# Altium PCB AD Sensor Module - SC.PcbDoc
Units mil, origin at the board's own origin, x right, y up, seen from the top; angles counter-clockwise.
Board outline 3740 x 1375 mil, 2 copper layers (Top Layer, Bottom Layer); 74 components, 51 nets, 249 pads, 53 vias.
Unrouted connection lines stored in the file: 135.
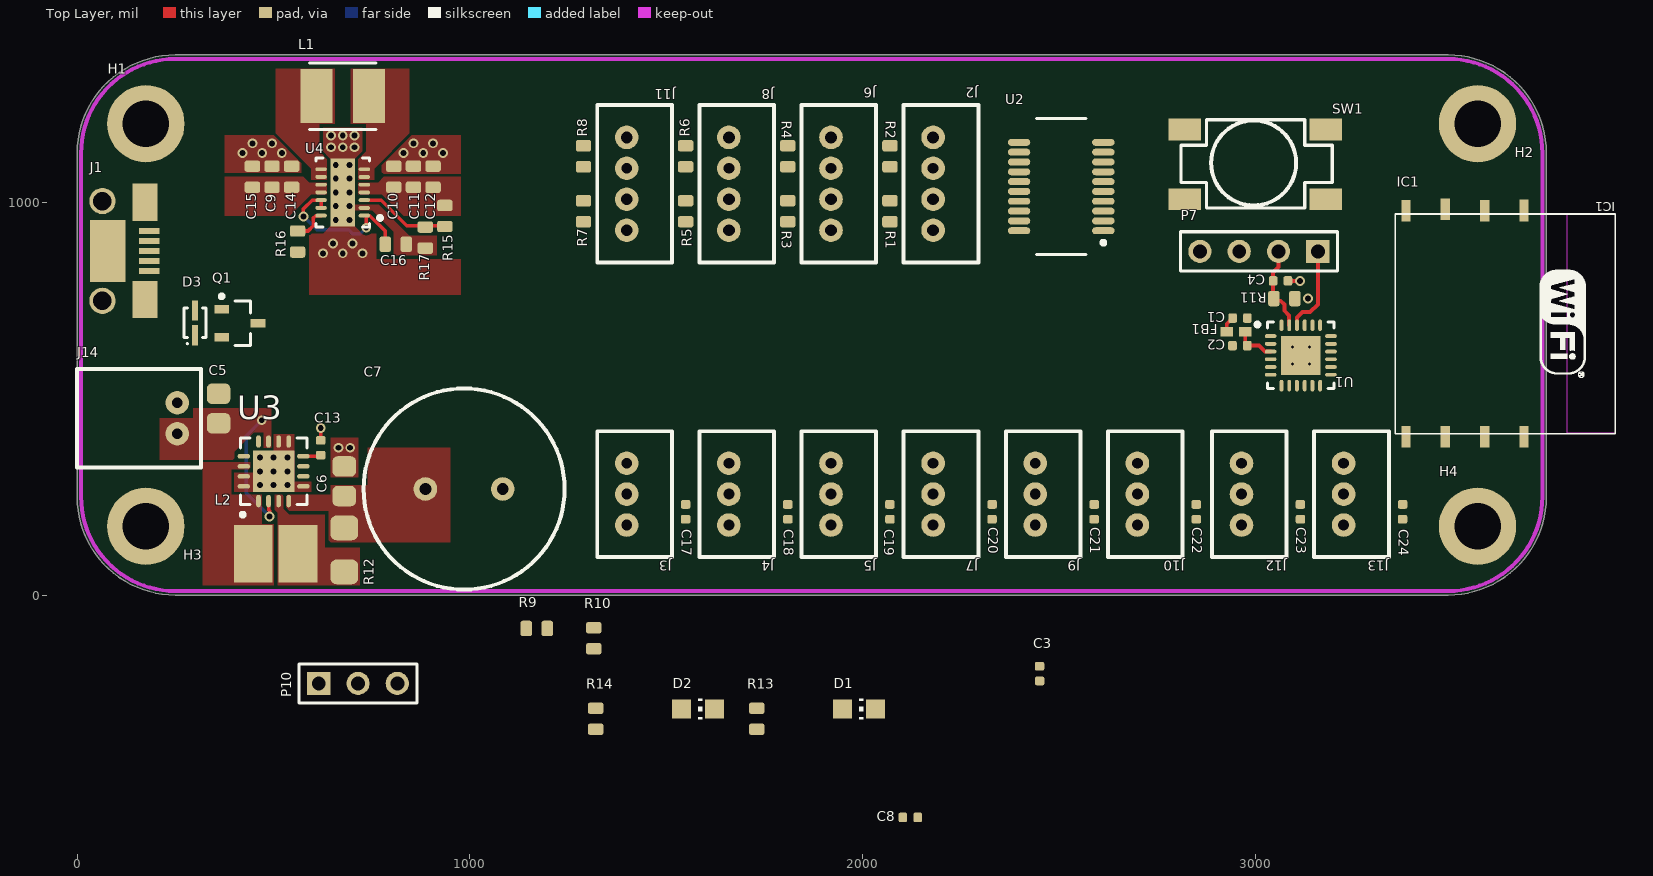
[diagram p0: Top Layer view]
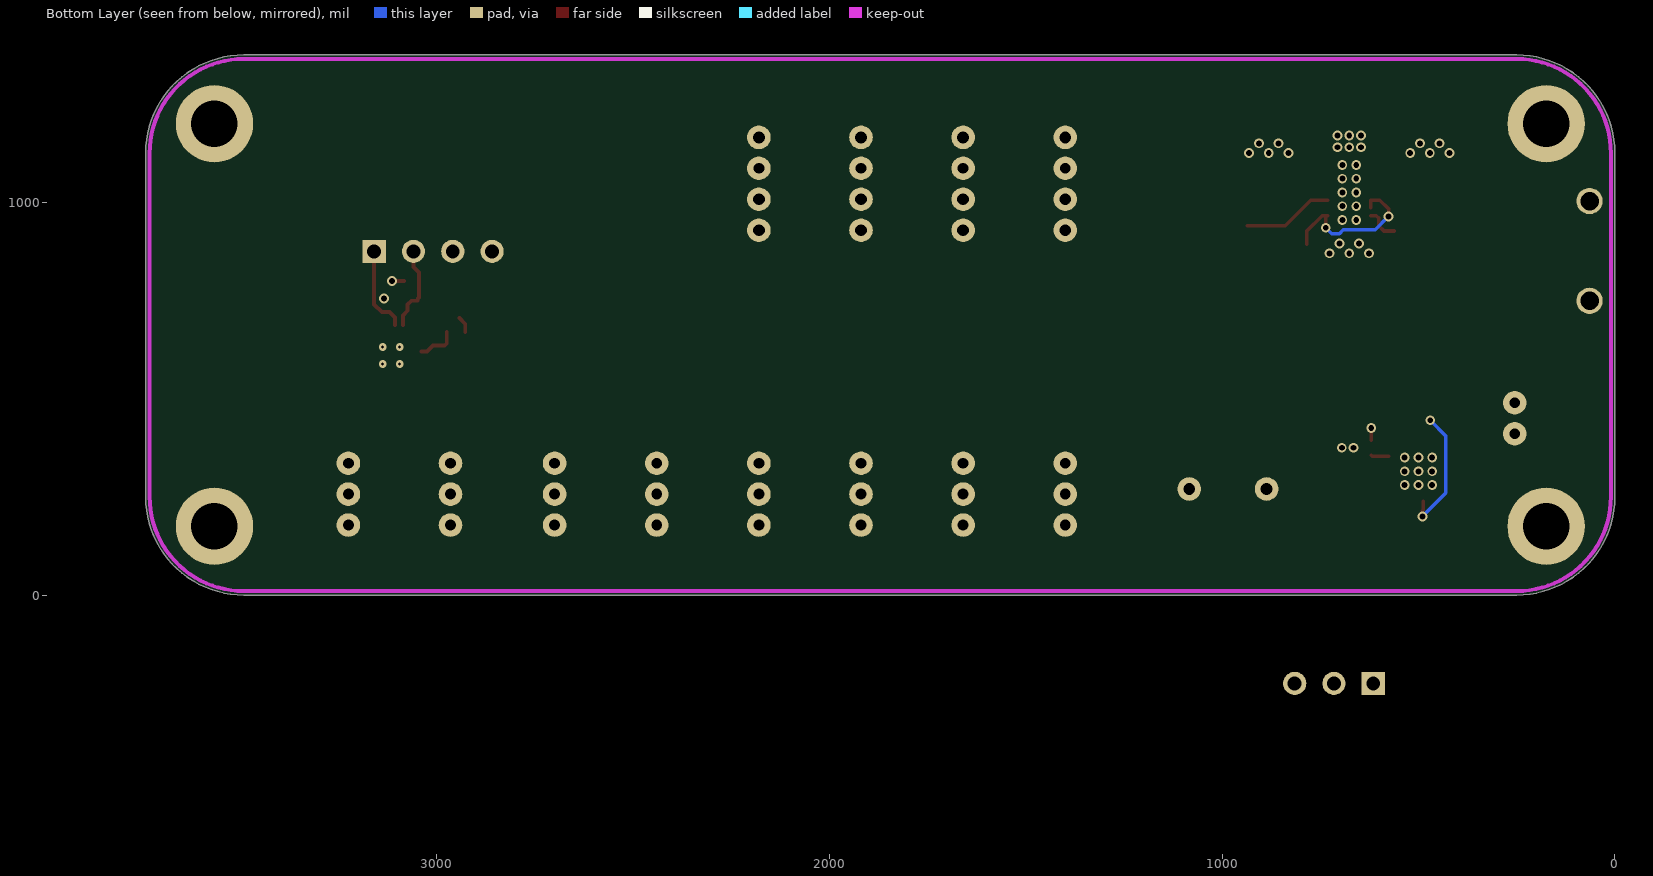
[diagram p1: Bottom Layer view, seen from below]

## Layer stack, top to bottom
Top Solder: solder mask 0.4, Solder Resist, Dk 3.5
Top Layer: signal copper 1.4
Dielectric 1: dielectric 12.6, FR-4, Dk 4.8
Bottom Layer: signal copper 1.4
Bottom Solder: solder mask 0.4, Solder Resist, Dk 3.5

## Board outline
0,250 0,1125 cw(c250,1125) 250,1375 3490,1375 cw(c3490,1125) 3740,1125 3740,250 cw(c3490,250) 3490,0 250,0 cw(c250,250)

## Design rules (kind name [scope] priority, off if disabled: settings)
AcuteAngle [All] p1: minimum=6.00000000000000E+0001 checktracksonly=FALSE
Clearance [All] p1: gap=7
ComponentClearance [All] p1: gap=7 collisioncheckmode=3 verticalgap=10 showdistances=TRUE
FanoutControl Fanout_SOIC [(InComponent('U8') AND InComponent('U7'))] p3: bgadir=Out bgaviamode=Centered fanoutstyle=Staggered fanoutdirection=Alternating viagrid=1 // Fanout_SOIC (Default Rule)
FanoutControl Fanout_Small [All] p4: bgadir=Out bgaviamode=Centered fanoutstyle=Auto fanoutdirection=Alternating viagrid=1 // Fanout_Small (Default Rule)
HoleSize [All] p1: absolutevalues=TRUE maxlimit=200 minlimit=15 maxpercent=80.000 minpercent=20.000
MinimumSolderMaskSliver [All] p1 off: minsoldermaskwidth=10
PasteMaskExpansion [All] p1: expansion=-1
PolygonConnect [All] p1: connectstyle=Direct reliefconductorwidth=10 reliefentries=4 polygonreliefangle="90 Angle" airgapwidth=10
RoutingVias [All] p1: holewidth=15 width=25 viastyle="Through Hole" minholewidth=15 minwidth=25 maxholewidth=28 maxwidth=50
SMDToCorner [All] p1: distance=30000
SilkToSilkClearance [All] p1 off: silktosilkclearance=10
SilkToSolderMaskClearance SilkscreenOverComponentPads [IsPad] p1 off: minsilkscreentomaskgap=10 clearancetoexposedcopper=TRUE
SolderMaskExpansion [All] p1: expansion=4
Width [All] p1: maxlimit=200 minlimit=7 preferedwidth=8 minimp=50.000000 maximp=50.000000 favimp=50.000000
22 further rules are at their usual default settings.

## Components (designator, comment, footprint, x,y, rotation, side; value= is the part's Value field where it differs from the comment)
C1 "100nF" C0402 2960,705 r0 top
C2 "100nF" C0402 2960,635 r180 top
C3 "100nF" C0402 2450,-200 r90 top
C4 "100nF" C0402 3063.23,799.84 r0 top
C5 "0805" C0805 360,475 r270 top
C6 "CL21F475ZPFNNNE" C0805 680,290 r270 top
C7 "106DCN2R7STJD" 106DCN2R7STJD 985,270 r270 top
C8 "100nF" C0402 2121,-566 r180 top
C9 "0603" C0603 496,1065 r270 top
C10 "0603" C0603 806,1065 r270 top
C11 "0603" C0603 856,1065 r270 top
C12 "0603" C0603 906,1065 r270 top
C13 "100nF" C0402 620,375 r90 top
C14 "0603" C0603 546,1065 r270 top
C15 "0603" C0603 446,1065 r270 top
C16 "0603" C0603 811,893 r180 top
C17 "100nF" C0402 1549,212 r270 top
C18 "100nF" C0402 1809,212 r270 top
C19 "100nF" C0402 2069,212 r270 top
C20 "100nF" C0402 2329,212 r270 top
C21 "100nF" C0402 2589,212 r270 top
C22 "100nF" C0402 2849,212 r270 top
C23 "100nF" C0402 3114,212 r270 top
C24 "100nF" C0402 3374,212 r270 top
D1 "5988140107F" LED2012120 1990,-290 r0 top
D2 "5988140107F" LED2012120 1580,-290 r0 top
D3 "BAT20JFILM" "BAT20JFILM - DIOM1712X11N" 300,693 r90 top
FB1 "BLM15HG601SN1D" BLM18PG121SN1D 2950,670 r0 top
H1 "M3 Hole" Hole-3mm#1 230,1200 r0 top
H2 "M3 Hole" Hole-3mm#2 3565,1200 r0 top
H3 "M3 Hole" Hole-3mm#3 235,245 r0 top
H4 "M3 Hole" Hole-3mm#2 3565,175 r0 top
IC1 "ESP8266 ESP-02" "ESP8266 ESP-02" 3915,970 r180 top
J1 "DX4R005J91R5100" "Micro USB Circular Holes Only" 25,875 r270 top
J2 "B4B-PH-K-S LF SN" B4B-PH-K-S(LF)(SN) 2179,1047 r270 top
J3 "B3B-PH-K-S(LF)(SN)" B3B-PH-K-S(LF)(SN) 1399,257 r270 top
J4 "B3B-PH-K-S(LF)(SN)" B3B-PH-K-S(LF)(SN) 1659,257 r270 top
J5 "B3B-PH-K-S(LF)(SN)" B3B-PH-K-S(LF)(SN) 1919,257 r270 top
J6 "B4B-PH-K-S LF SN" B4B-PH-K-S(LF)(SN) 1919,1047 r270 top
J7 "B3B-PH-K-S(LF)(SN)" B3B-PH-K-S(LF)(SN) 2179,257 r270 top
J8 "B4B-PH-K-S LF SN" B4B-PH-K-S(LF)(SN) 1659,1047 r270 top
J9 "B3B-PH-K-S(LF)(SN)" B3B-PH-K-S(LF)(SN) 2439,257 r270 top
J10 "B3B-PH-K-S(LF)(SN)" B3B-PH-K-S(LF)(SN) 2699,257 r270 top
J11 "B4B-PH-K-S LF SN" B4B-PH-K-S(LF)(SN) 1399,1047 r270 top
J12 "B3B-PH-K-S(LF)(SN)" B3B-PH-K-S(LF)(SN) 2964,257 r270 top
J13 "B3B-PH-K-S(LF)(SN)" B3B-PH-K-S(LF)(SN) 3224,257 r270 top
J14 "S2B-PH-K-S(LF)(SN)" S2B-PH-K-S(LF)(SN) 255,450 r270 top
L1 "XFL4020-152ML" "XFL4020-152ML - INDP4040X21N" 676,1270 r0 top
L2 "SRN4018-4R7M" "SRN4018-4R7M - INDP4040X18N" 505,105 r0 top
P7 "Header 4" HDR1X4 3158.23,874.84 r180 top
P10 "Header 3" HDR1X3 615,-225 r0 top
Q1 "DMG2307L-7" "DMG2307L-7 - SOT92P240X102-3N" 414,692 r0 top
R1 "4.7K" R0603 2069,977 r90 top
R2 "4.7K" R0603 2069,1117 r270 top
R3 "4.7K" R0603 1809,977 r90 top
R4 "4.7K" R0603 1809,1117 r270 top
R5 "4.7K" R0603 1549,977 r90 top
R6 "4.7K" R0603 1549,1117 r270 top
R7 "4.7K" R0603 1289,977 r90 top
R8 "4.7K" R0603 1289,1117 r270 top
R9 "1K" R0603 1170,-85 r0 top
R10 "1K" R0603 1315,-110 r90 top
R11 "1K" R0603 3073.23,754.84 r0 top
R12 "RU3216FR051CS" R1206 680,115 r270 top
R13 "1K" R0603 1730,-315 r90 top
R14 "1K" R0603 1320,-315 r90 top
R15 "RC1608F105CS" R0603 936,965 r270 top
R16 "RC1608F105CS" R0603 561,900 r90 top
R17 "RC1608F184CS" R0603 886,910 r270 top
SW1 "TL3301AF160QG" TL3301AF160QG 2820,1185 r0 top
U1 "MKL05Z16VFK4 - VQFN24" 98ASA00474D 3115,610 r0 top
U2 "PCA9518DWR" PCA9518DWR 2505,1040 r180 top
U3 "ZSPM4523" "ZSPM4523 - QFN65P400X400X100_HS-17N" 500,315 r90 top
U4 "TPS63020DSJR" "TPS63020 - QFN50P400X300X100-22N" 676,1025 r180 top

## Footprints (in the part's own frame and the unit in brackets; to place one, negate y for a bottom-side part, rotate by r counter-clockwise, add the part's x,y. Pads: shape width x height; smd on the part's side, far side on the other; paste and mask are expansions set on the pad)
98ASA00474D [mm] "QFN, 24-Leads, Body 3.98x3.98mm, Pitch 0.50mm, Thermal Pad 2.80x2.80mm, IPC Medium Density"
  oval 0.75x0.25 smd: 1(-1.95,1.25) 2(-1.95,0.75) 3(-1.95,0.25) 4(-1.95,-0.25) 5(-1.95,-0.75) 6(-1.95,-1.25) 13(1.95,-1.25) 14(1.95,-0.75) 15(1.95,-0.25) 16(1.95,0.25) 17(1.95,0.75) 18(1.95,1.25)
  oval 0.25x0.75 smd: 7(-1.25,-1.95) 8(-0.75,-1.95) 9(-0.25,-1.95) 10(0.25,-1.95) 11(0.75,-1.95) 12(1.25,-1.95) 19(1.25,1.95) 20(0.75,1.95) 21(0.25,1.95) 22(-0.25,1.95) 23(-0.75,1.95) 24(-1.25,1.95)
  rect 2.54x2.54 smd: 25(0,0)
  silkscreen extent -2.92,-2.15 2.15,2.15, body extent -2,-2 2,2, height 1
106DCN2R7STJD [mil] "106DCN2R7STJD"
  round 60 hole 30: 0(0,98.43) 1(0,-98.43)
  silkscreen extent -256,-256 256,256, body extent -246,-246 246,246, height 1063
B3B-PH-K-S(LF)(SN) [mil] "B3B-PH-K-S(LF)(SN)"
  round 60 hole 27.56: 1(-78.74,0) 2(0,0) 3(78.74,0)
  silkscreen extent -160,-75 160,115, body extent -156,-67 156,110, height 236
B4B-PH-K-S(LF)(SN) [mil] "B4B-PH-K-S(LF)(SN)"
  round 60 hole 30: 1(-118.11,0) 3(39.37,0) 4(118.11,0)
  round 60 hole 27.56: 2(-39.37,0)
  silkscreen extent -200,-75 200,115, body extent -195,-67 195,110, height 236
"BAT20JFILM - DIOM1712X11N" [mm] "Molded Diode, 2-Leads, Body 1.66x1.23mm, IPC Medium Density"
  rect 1.3x0.4 smd: 1(-0.8,0) 2(0.8,0)
  silkscreen extent -1.4,-0.7 0.95,0.7, body extent -0.9,-0.67 0.9,0.67, height 1.13
BLM18PG121SN1D [mm] "Chip Inductor, 2-Leads, Body 1.0x0.5mm, IPC Medium Density"
  rect 0.8x0.6 smd: 1(-0.6,0) 2(0.6,0)
  body extent -0.52,-0.28 0.53,0.27, height 0.6
C0402 [mil]
  rrect40% 22x24 smd: 1(-18.7,0) 2(19,0)
  body extent -20,-10 20,10, height 20
C0603 [mm]
  rrect40% 0.74x1 smd: 1(-0.68,0) 2(0.68,0)
  body extent -0.8,-0.4 0.8,0.4, height 0.8
C0805 [mil]
  rrect50% 52x60 smd: 1(-37.4,0) 2(38,0)
  body extent -40,-30 40,30, height 35
"DMG2307L-7 - SOT92P240X102-3N" [mm] "SOT23, 3-Leads, Body 2.85x2.40mm, Pitch 0.92mm, IPC Medium Density"
  rect 0.95x0.55 smd: 1(-1.175,0.915) 2(-1.175,-0.915) 3(1.175,0)
  silkscreen extent -1.3,-1.45 0.7,1.86, body extent -0.7,-1.45 0.7,1.45, height 1.03
"ESP8266 ESP-02" [mil] "ESP8266 ESP-02"
  rect 23.62x55.12 smd: 1(232,-9) 2(332,-8) 3(432,-12) 4(532,-8) 5(532,567) 6(432,567) 7(332,567) 8(232,567)
  Top Layer keep-out region: 0,559.06 1.06,558 122,558 122,1 121,0 0,0
  silkscreen extent 0,0 559,559, body extent 0,0 559,559, height 39
HDR1X3 [mm] "Connector; Header; 3 Position"
  rect 1.5x1.5 hole 0.9: 1(0,0)
  round 1.5 hole 0.9: 2(2.54,0) 3(5.08,0)
  silkscreen extent -1.27,-1.27 6.35,1.27
HDR1X4 [mm] "Connector; Header; 4 Position"
  rect 1.5x1.5 hole 0.9: 1(0,0)
  round 1.5 hole 0.9: 2(2.54,0) 3(5.08,0) 4(7.62,0)
  silkscreen extent -1.27,-1.27 8.89,1.27
Hole-3mm#1 [mm]
  round 5 hole 3: 1(-1.397,0)
Hole-3mm#2 [mm]
  round 5 hole 3: 1(0,0)
Hole-3mm#3 [mm]
  round 5 hole 3: 1(-1.524,-1.778)
LED2012120 [mil]
  rect 48x48 smd: A(-41.34,0) C(42,0)
  silkscreen extent 0,-27 12,27, body extent -50,-25 50,25, height 28
"Micro USB Circular Holes Only" [mm]
  rect 0.4x1.35 smd: 1(1.275,4.025) 2(0.625,4.025) 3(-0.025,4.025) 4(-0.675,4.025) 5(-1.325,4.025)
  rect 2.4x1.6 smd: 6(3.125,3.75) 9(-3.175,3.75)
  round 1.7 hole 1.2: 7(3.2,1) 8(-3.25,1)
  rect 4x2.3 smd: GND(-0.025,1.35)
PCA9518DWR [mm] "SOP, 20-Leads, Body 8.65x3.90mm, Pitch 0.64mm, Thermal Pad 5.22x3.10mm, IPC Medium Density"
  oval 1.45x0.45 smd: 1(-2.725,2.857) 2(-2.725,2.222) 3(-2.725,1.587) 4(-2.725,0.952) 5(-2.725,0.317) 6(-2.725,-0.318) 7(-2.725,-0.953) 8(-2.725,-1.588) 9(-2.725,-2.223) 10(-2.725,-2.858) 11(2.725,-2.857) 12(2.725,-2.222) 13(2.725,-1.587) 14(2.725,-0.952) 15(2.725,-0.317) 16(2.725,0.318) 17(2.725,0.953) 18(2.725,1.588) 19(2.725,2.223) 20(2.725,2.858)
  silkscreen extent -2.85,-4.4 1.6,4.4, body extent -2,-4.4 2,4.4, height 1.75
R0603 [mm]
  rrect40% 0.74x1 smd: 1(-0.68,0) 2(0.68,0)
  body extent -0.8,-0.4 0.8,0.4, height 0.8
R1206 [mil]
  rrect50% 63x71 smd: 1(-55.98,0) 2(56,0)
  body extent -61,-31 61,31, height 24
S2B-PH-K-S(LF)(SN) [mil] "S2B-PH-K-S(LF)(SN)"
  round 60 hole 27.56: 1(-39.37,0) 2(39.37,0)
  silkscreen extent -125,-255 125,60, body extent -116,-246 116,53, height 189
"SRN4018-4R7M - INDP4040X18N" [mm] "Precision Wire Wound Inductor, 2-Leads, Body 4.00x4.00mm, IPC Medium Density"
  rect 2.5x3.7 smd: 1(-1.45,0) 2(1.45,0)
  body extent -2.1,-2.1 2.1,2.1, height 1.8
TL3301AF160QG [mm] "TL3301AF160QG Tactile Switch"
  rect 2.1x1.4 smd: 1(0,0) 1(9.1,0) 2(0,-4.5) 2(9.1,-4.5)
  silkscreen extent -0.25,-5.08 9.53,0.64, body extent -0.43,-5.26 9.57,0.74, height 5.11
"TPS63020 - QFN50P400X300X100-22N" [mm] "QFN, 22-Leads, Body 4.00x3.00mm, Pitch 0.50mm, IPC Medium Density"
  oval 0.74x0.25 smd: 1(-1.4,1.5) 2(-1.4,1) 3(-1.4,0.5) 4(-1.4,0) 5(-1.4,-0.5) 6(-1.4,-1) 7(-1.4,-1.5) 8(1.4,-1.5) 9(1.4,-1) 10(1.4,-0.5) 11(1.4,0) 12(1.4,0.5) 13(1.4,1) 14(1.4,1.5)
  rect 1.58x4.4 smd: 15(0,0)
  silkscreen extent -2.54,-2.22 1.73,2.22, body extent -1.57,-2.07 1.58,2.07, height 1
"XFL4020-152ML - INDP4040X21N" [mm] "Precision Wire Wound Inductor, 2-Leads, Body 4.00x4.00mm, IPC Medium Density"
  rect 2.05x3.5 smd: 1(-1.7,0) 2(1.7,0)
  silkscreen extent -2.15,-2.15 2.15,2.15, body extent -2.15,-2.15 2.15,2.15, height 2.1
"ZSPM4523 - QFN65P400X400X100_HS-17N" [mm] "QFN, 16-Leads, Body 4.00x4.00mm, Pitch 0.65mm, Thermal Pad 2.68x2.68mm, IPC Medium Density"
  oval 0.8x0.3 smd: 1(-1.925,0.975) 2(-1.925,0.325) 3(-1.925,-0.325) 4(-1.925,-0.975) 9(1.925,-0.975) 10(1.925,-0.325) 11(1.925,0.325) 12(1.925,0.975)
  oval 0.3x0.8 smd: 5(-0.975,-1.925) 6(-0.325,-1.925) 7(0.325,-1.925) 8(0.975,-1.925) 13(0.975,1.925) 14(0.325,1.925) 15(-0.325,1.925) 16(-0.975,1.925)
  rect 2.68x2.68 smd: 17(0,0)
  silkscreen extent -2.92,-2.15 2.15,2.15, body extent -2,-2 2,2, height 1

## Part data
C1 C2 C3 C4 C8 C13 C17 C18 C19 C20 C21 C22 C23 C24: library part GRM155R71C104KA88D, "CAP CER 0402 100nF 16V 10% X7R"
C5: library part CL21A106KPCLQNC, "CAP CER 10UF 10V X5R 0805"
C6: "CAP CER 4.7UF 10V Y5V 0805"
C7: "CAP 10F -20%, +50% 2.7V T/H"
C9 C14: library part CL10A106KQ8NNNC, "CAP CER 10UF 6.3V X5R 0603"
C10 C11 C12: library part CL10A226KQ8NRNE, "CAP CER 22UF 6.3V X5R 0603"
C15 C16: library part CL10B104KB8SFNC, "CAP CER 0.1UF 50V 10% X7R 0603"
D1 D2: "LED 0805 Yellow"
D3: "DIODE SCHOTTKY 23V 1A SOD323"
H1 H2 H3 H4: library part Hole, "3mm Hole"
J1: library part "Micro USB", "Micro USB Jack B"
J2 J6 J8 J11: "CONN HEADER PH TOP 4POS 2MM"
J3 J4 J5 J7 J9 J10 J12 J13: "CONN HEADER PH TOP 3POS 2MM"
J14: "CONN HEADER PH SIDE 2POS 2MM"
L2: "FIXED IND 4.7UH 1.9A 84 MOHM SMD"
P7: "Header, 4-Pin"
P10: "Header, 3-Pin"
Q1: "MOSFET P-CH 30V 2.5A SOT-23"
R1 R2 R3 R4 R5 R6 R7 R8: library part ERJ3EKF4701V, "RES 0603 4.7K 100mW 1%"
R9 R10 R11 R13 R14: library part ERJ-3EKF1001V, "RES 0603 1K 100mW 1%"
R12: "RES SMD 0.051 OHM 1% 1/2W 1206 Current Sense Resistor*"
R15 R16: "RES SMD 1M OHM 1% 1/10W 0603"
R17: "RES SMD 180K OHM 1% 1/10W 060"
U1: library part "MKL05Z16VFK4 - 24 Pin VQFN", "ARM Cortex M0+"
U2: "IC EXPANDABLE 5CH I2C HUB 20SOIC"
U3: "ZSPM4523 Charge Controller"
U4: library part TPS63020, "IC REG BUCK BST ADJ 3.5A 14VSON"

## Via types
v1: diameter 25, hole 15, Top Layer to Bottom Layer, 49 vias
v2: diameter 19.68, hole 7.87, Top Layer to Bottom Layer, 4 vias

## Nets (pads, with @x,y where several pads share a name; then routed paths per layer and width w, separated by ;. In a path a pad name is that pad's centre, name@x,y a point inside that pad or via, vN(x,y) a via of type N, cw(c..) or ccw(c..) an arc to the next point about the centre after c; other vN are vias at no path point)
3.3VCC: C1.1 C3.1 C8.1 C10.2 C11.2 C12.2 C17.1 C18.1 C19.1 C21.1 C22.1 C23.1 C24.1 FB1.1 IC1.4 J2.1 J3.2 J4.2 J5.2 J6.1 J8.1 J9.2 J10.2 J11.1 J12.2 J13.2 R1.1 R2.1 R3.1 R4.1 R5.1 R6.1 R7.1 R8.1 R9.2 R10.2 R11.2 R15.1 R16.1 U2.20 U4.4 U4.5 | length 41.2
  Top Layer w10: FB1.1 2926.38,690.08 C1.1
  other v1: 3133.23,754.84
EN1: U1.7 U2.7
EN2: U1.8 U2.11
EN3: U1.20 U2.14
EN4: U1.21 U2.17
ESP_01_RST: IC1.7 P10.2 R9.1
FGND: J1.6 J1.7 J1.8 J1.9
GND: C1.2 C2.2 C3.2 C4.2 C5.1 C6.1 C8.2 C9.1 C10.1 C11.1 C12.1 C13.2 C14.1 C15.1 C16.1 C17.2 C18.2 C19.2 C20.2 C21.2 C22.2 C23.2 C24.2 D1.C D2.C H1.1 H2.1 H3.1 H4.1 IC1.1 J1.5 J2.4 J3.3 J4.3 J5.3 J6.4 J7.3 J8.4 J9.3 J10.3 J11.4 J12.3 J13.3 J14.1 P7.4 P10.1 R17.2 SW1.2 U1.4 U1.25 U2.10 U3.5 U3.9 U3.10 U3.15 U3.16 U3.17 U4.2 U4.15 | length 62
  Top Layer w9: C13.2 v1(620,425)
  Top Layer w10: C4.2 v1(3113.23,799.84)
  other v1: 465,280 500,280 535,280 465,315 500,315 535,315 465,350 500,350 535,350 665,375 695,375 626,870 676,870 726,870 651,895 701,895 658.28,955 693.72,955 658.28,990 693.72,990 658.28,1025 693.72,1025 658.28,1060 693.72,1060 658.28,1095 693.72,1095 421,1125 471,1125 521,1125 831,1125 881,1125 931,1125 646,1140 676,1140 706,1140 446,1150 496,1150 856,1150 906,1150 646,1170 676,1170 706,1170
  other v2: 3093.35,588.35 3136.65,588.35 3093.35,631.65 3136.65,631.65
I2C_SCL: U1.5 U2.4
I2C_SDA: U1.6 U2.3
K_CH_PD: IC1.8 R10.1
K_ESP_RST: P10.3 U1.19
LED0: R13.1 U1.1
LED1: R14.1 U1.2
NetC2_1: C2.1 FB1.2 U1.3 | length 102.9
  Top Layer w10: FB1.2 2973.62,640.08 C2.1 3008.98,635 3024.14,619.84 U1.3
NetC5_2: C5.2 J14.2 U3.2 U3.11 | length 326.8
  Top Layer w9: U3.2 487.2,217.8 490,215 v1(490,200)
  Bottom Layer w9: v1(470,445) 430,405 430,260 v1(490,200)
NetC6_2: C6.2 C7.1 Q1.3 R12.1 U3.4
NetC9_2: C9.2 C14.2 C15.2 D3.1 Q1.2 U4.10 U4.11
NetC13_1: C13.1 U3.8 | length 45.4
  Top Layer w9: U3.8 617.09,353.39 C13.1
NetC16_2: C16.2 U4.1 U4.12 U4.13 | length 406.4
  Top Layer w9: v1(576,964) 576,983 598.32,1005.32 U4.12 U4.13 ; U4.1@731,965.83 U4.1 745.06,965.94 784.23,926.77 C16.2 ; v1(736,935) 736,960.83
  Bottom Layer w9: v1(576,964) 610,930 691,930 701,920 721,920 v1(736,935)
NetC20_1: C20.1 J7.2
NetD1_A: D1.A R13.2
NetD2_A: D2.A R14.2
NetD3_2: D3.2 J1.1 Q1.1
NetJ2_2: J2.2 R2.2 U2.6
NetJ2_3: J2.3 R1.2 U2.5
NetJ6_2: J6.2 R4.2 U2.9
NetJ6_3: J6.3 R3.2 U2.8
NetJ8_2: J8.2 R6.2 U2.13
NetJ8_3: J8.3 R5.2 U2.12
NetJ11_2: J11.2 R8.2 U2.16
NetJ11_3: J11.3 R7.2 U2.15
NetL1_1: L1.1 U4.8 U4.9
NetL1_2: L1.2 U4.6 U4.7
NetL2_1: L2.1 U3.1 U3.14
NetL2_2: L2.2 R12.2 U3.3
NetR15_2: R15.2 R17.1 U4.3 | length 231.9
  Top Layer w9: U4.3 773.68,1005.32 839,940 R15.2@936,940
NetR16_2: R16.2 U4.14 | length 87.8
  Top Layer w9: R16.2 587.77,926.77 601,940 601,960 606.94,965.94 U4.14
RESET: C4.1 P7.2 R11.1 SW1.1 U1.23 | length 213.8
  Top Layer w10: R11.1 3044.53,756.78 C4.1 3044.53,821.14 3058.23,834.84 P7.2 ; R11.1@3047.97,749.27 3063.8,749.27 3073.44,739.63 3073.44,723.81 3085.47,711.77 U1.23
SENSOR0: J3.1 U1.9
SENSOR1: J4.1 U1.10
SENSOR2: J5.1 U1.11
SENSOR3: J7.1 U1.12
SENSOR4: J9.1 U1.13
SENSOR5: J10.1 U1.14
SENSOR6: J12.1 U1.15
SENSOR7: J13.1 U1.16
TCK/SWDCLK: P7.1 U1.22 | length 221.8
  Top Layer w10: U1.22 3105.16,706.77 3118.93,720.54 3138.93,720.54 3158.23,739.84 P7.1
TMS/SWDIO: P7.3 U1.24
UART0_RX: IC1.2 U1.18
UART0_TX: IC1.3 U1.17
pads on no net: C7.0 IC1.5 IC1.6 J1.2 J1.3 J1.4 J1.GND U2.1 U2.2 U2.18 U2.19 U3.6 U3.7 U3.12 U3.13

## Polygon pours and split planes (outlines as drawn)
GND on Top Layer "Top Layer-No Net" (solid, pour order 43): 645,300 715,300 715,400 645,400
NetC6_2 on Top Layer "Top Layer-No Net" (solid, pour order 41): 530,255 530,220 535,215 640,215 640,140 645,135 950,135 950,280 950,375 740,375 740,280 650,280 645,280 645,255
NetL2_2 on Top Layer "Top Layer-No Net" (solid, pour order 39): 503,255 503,217 510,210 510,25 620,25 720,25 720,120 630,120 630,205 540,205 525,220 525,255
NetC5_2 on Top Layer "Top Layer-No Net" (solid, pour order 37): 210,450 210,345 220,345 400,345 400,365 450,415 475,415 475,375 494,375 494,450 494,475 295,475 295,450
GND on Top Layer "Top Layer-No Net" (solid, pour order 35): 400,312 400,263 445,263 596,263 596,289 552,289 552,410 501,410 501,312
NetL2_1 on Top Layer "Top Layer-No Net" (solid, pour order 33): 440,320 440,338 320,338 320,25 500,25 500,180 470,180 470,255 392,255 392,262 392,320
GND on Top Layer "Top Layer-No Net" (solid, pour order 12): 641,1115 646,1110 706,1110 711,1115 726,1130 726,1170 726,1190 626,1190 626,1130
NetL1_2 on Top Layer "Top Layer-No Net" (solid, pour order 16): 696,1200 736,1200 736,1130 716,1110 716,1057 756,1057 756,1085 846,1175 846,1340 696,1340
NetL1_1 on Top Layer "Top Layer-No Net" (solid, pour order 18): 656,1340 506,1340 506,1175 511,1170 596,1085 596,1057 636,1057 636,1110 616,1130 616,1185 616,1200 656,1200
3.3VCC on Top Layer "Top Layer-No Net" (solid, pour order 20): 716,1050 766,1050 781,1065 881,1065 976,1065 976,965 831,965 776,1020 716,1020
GND on Top Layer "Top Layer-No Net" (solid, pour order 22): 976,1071 976,1170 852,1170 776,1094 776,1071
NetC9_2 on Top Layer "Top Layer-No Net" (solid, pour order 24): 636,1020 636,1050 591,1050 576,1065 376,1065 376,965 541,965 596,1020
GND on Top Layer "Top Layer-No Net" (solid, pour order 28): 671,993 671,980 751,980 806,925 806,865 916,865 916,915 846,915 768,993
GND on Top Layer "Top Layer-No Net" (solid, pour order 29): 646,940 641,935 626,920 591,920 591,765 976,765 976,855 966,855 791,855 761,855 761,920 726,920 706,940
GND on Top Layer "Top Layer-No Net" (solid, pour order 31): 376,1075 571,1075 571,1099 500,1170 376,1170

## Keep-outs
Keep-Out Layer:
  lines w10: 10,250 ccw(c250,250) 250,10 3490,10 ccw(c3490,250) 3730,250 3730,1125 ccw(c3490,1125) 3490,1365 250,1365 ccw(c250,1125) 10,1125 10,250

## Silkscreen, mask and mechanical layers (free items; w line width, h text height)
Mechanical 15:
  the board outline again, w10

## Dimensions
3490,1375 to 3490,0 on Mechanical 15
0,1125 to 3740,1125 on Mechanical 15